# Altium PCB car_template 2020V3.PcbDoc (part 2 of 2)
Units mm, origin at the board's own origin, x right, y up, seen from the top; angles counter-clockwise.
Board outline 64 x 85 mm, 4 copper layers (Top Side, Ground Plane, Power Plane, Bottom Side), stack 0.844 mm thick; 107 components, 71 nets, 321 pads, 94 vias.
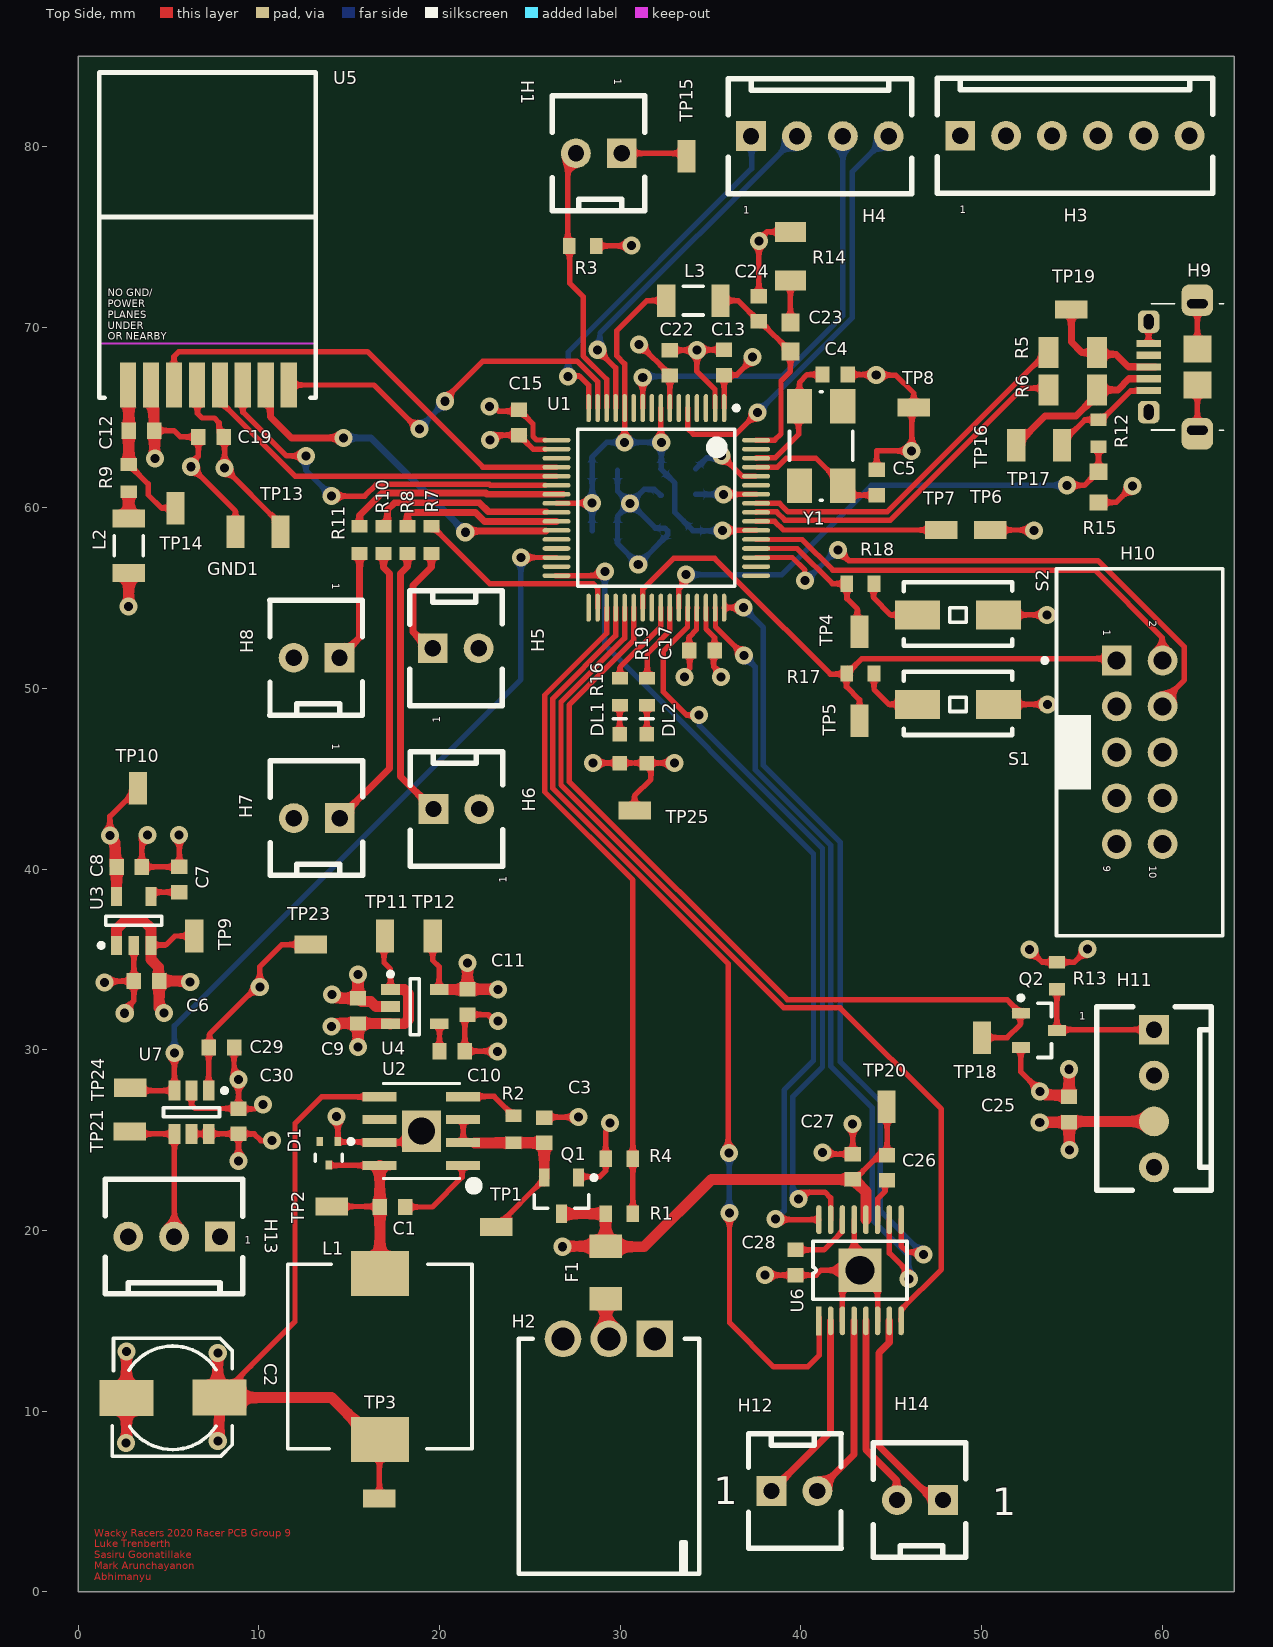
[diagram p0: Top Side view]

## Polygon pours and split planes (outlines as drawn) (continued)
3V3 on Power Plane (split plane): 63.49,32.029 21.604,32.029 19.217,34.417 19.175,34.445 19.125,34.454 13.575,34.454 13.525,34.445 13.483,34.417 11.371,32.304 10.029,32.304 8.604,33.729 8.604,34.396 8.855,34.646 8.9,34.655 8.942,34.683 8.97,34.725 8.979,34.775 8.979,54.778 8.995,54.8 9.004,54.85 8.995,54.9 8.967,54.942 7.204,56.704 7.204,60.978 7.22,61 7.229,61.05 7.229,63.421 8.404,64.596 15.575,64.596 15.625,64.605 15.667,64.633 26.242,75.208 26.27,75.25 26.279,75.3 26.279,84.49 63.49,84.49
5V on Power Plane (split plane): 9.958,31.433 10,31.405 10.05,31.396 11.671,31.396 11.72,31.405 11.762,31.433 12.699,32.371 18.921,32.371 20.933,30.358 20.975,30.33 21.025,30.321 63.49,30.321 63.49,0.51 0.51,0.51 0.51,34.745 6.647,34.745
3V3RF on Power Plane (split plane): 5.046,63.371 5.046,61.675 5.046,58.928 5.046,56.293 5.055,56.243 5.083,56.201 6.983,54.302 6.983,37.341 5.585,35.943 0.51,35.943 0.51,64.006 4.411,64.006
no net on Power Plane (split plane): 26.021,84.375 0.875,84.375 0.875,65.227 15.894,65.227 15.521,64.854 8.35,64.854 8.3,64.845 8.258,64.817 7.008,63.567 6.98,63.525 6.971,63.475 6.971,61.097 6.955,61.075 6.946,61.025 6.946,56.65 6.955,56.6 6.983,56.558 8.721,54.821 8.721,35.425 8.721,34.879 8.383,34.542 8.355,34.5 8.346,34.45 8.346,33.675 8.355,33.625 8.383,33.583 9.883,32.083 9.925,32.055 9.975,32.046 11.425,32.046 11.475,32.055 11.517,32.083 13.629,34.196 19.071,34.196 21.458,31.808 21.5,31.78 21.55,31.771 63.49,31.771 63.49,30.579 21.079,30.579 19.067,32.592 19.025,32.62 18.975,32.629 12.646,32.629 12.596,32.62 12.554,32.592 11.617,31.654 10.104,31.654 6.792,34.966 6.75,34.994 6.701,35.004 0.51,35.004 0.51,35.685 5.639,35.685 5.688,35.694 5.73,35.722 7.204,37.196 7.232,37.238 7.241,37.287 7.241,54.356 7.232,54.406 7.204,54.448 5.304,56.347 5.304,58.928 5.304,61.675 5.304,63.42 5.304,63.422 5.304,63.425 5.295,63.475 5.267,63.517 4.557,64.227 4.515,64.255 4.465,64.264 0.51,64.264 0.51,84.49 26.021,84.49

## Other copper
Top Side:
  pour cut-out: 0.85,69.139 0.85,84.4 25.25,84.4 25.25,74.501 19.888,69.139
  pour cut-out: 0.051,69.139
  text "Wacky Racers 2020 Racer PCB Group 9 / Luke Trenberth / Sasiru Goonatillake / Mark Arunchayanon / Abhimanyu" at 0.885,0.652 h0.4
Bottom Side:
  pour cut-out: 0.918,65.176 15.951,65.176 26.05,75.275 26.05,84.375 0.887,84.375
Ground Plane (plane layer: these items are gaps in the copper):
  pour cut-out: 0.725,65.176 0.725,84.375 26.072,84.375 26.072,75.297 15.951,65.176
  region: 0,69.164
  region: 13.919,74.905
Power Plane (plane layer: these items are gaps in the copper):
  pour cut-out: 0.875,65.227 15.977,65.227 26.075,75.326 26.075,84.375 0.875,84.375
  lines w0.254: 0.45,34.874 6.701,34.874 10.05,31.525 10.45,31.525 11.671,31.525 12.646,32.5 13.703,32.5 18.975,32.5 21.025,30.45 64,30.45 ; 0.45,35.814 5.639,35.814 7.112,37.287 7.112,54.356 5.175,56.293 5.175,58.928 5.175,61.675 5.175,63.42 ; 0.475,64.135 4.465,64.135 5.175,63.425 ; 7.075,61.025 7.075,56.65 8.875,54.85 ; 7.1,61.05 7.1,63.475 8.35,64.725 15.575,64.725 26.15,75.3 26.15,85 ; 8.85,34.775 8.85,54.85 ; 8.85,35.425 8.85,34.825 8.475,34.45 8.475,33.675 9.975,32.175 11.425,32.175 13.575,34.325 19.125,34.325 21.55,31.9 64,31.9

## Silkscreen, mask and mechanical layers (free items; w line width, h text height)
Board Outline:
  lines w0.254: 0,0 64,0 64,85

## Dimensions
65,85 to 65,0 on Mechanical 1
0,86 to 64,86 on Mechanical 1

## Text inside footprints (layer, text, board x,y; h text height)
H1: Top Overlay "1" at 29.676,83.752 h0.4 r270
H3: Top Overlay "1" at 48.8,76.3 h0.4
H4: Top Overlay "1" at 36.825,76.275 h0.4
H5: Top Overlay "1" at 20.039,48.098 h0.4 r90
H6: Top Overlay "1" at 23.735,39.25 h0.4 r90
H7: Top Overlay "1" at 14.061,46.952 h0.4 r270
H8: Top Overlay "1" at 14.051,55.827 h0.4 r270
H9: Mechanical 1 "PCB Edge" at 64.22,65.65 h0.4 r90
H10: Top Overlay "9" at 56.735,40.19 h0.4 r270; Top Overlay "10" at 59.275,40.19 h0.4 r270; Top Overlay "1" at 56.735,53.25 h0.4 r270; Top Overlay "2" at 59.275,53.75 h0.4 r270
H11: Top Overlay "1" at 55.425,31.675 h0.4
H12: Top Overlay "1" at 35.19,4.85 h1.52
H13: Top Overlay "1" at 9.209,19.26 h0.4
H14: Top Overlay "1" at 50.6,4.225 h1.52
U2: Mechanical 13 "*" at 20.93,24.344 h0.4 r180
U5: Top Overlay "NO GND/ / POWER / PLANES / UNDER / OR NEARBY" at 1.625,69.3 h0.4